# Altium PCB PCB尺子2.PcbDoc (part 2 of 3)
Units mm, origin at the board's own origin, x right, y up, seen from the top; angles counter-clockwise.
Board outline 210 x 35 mm, 2 copper layers (Top Layer, Bottom Layer); 21 components, 0 nets, 1047 pads, 0 vias.
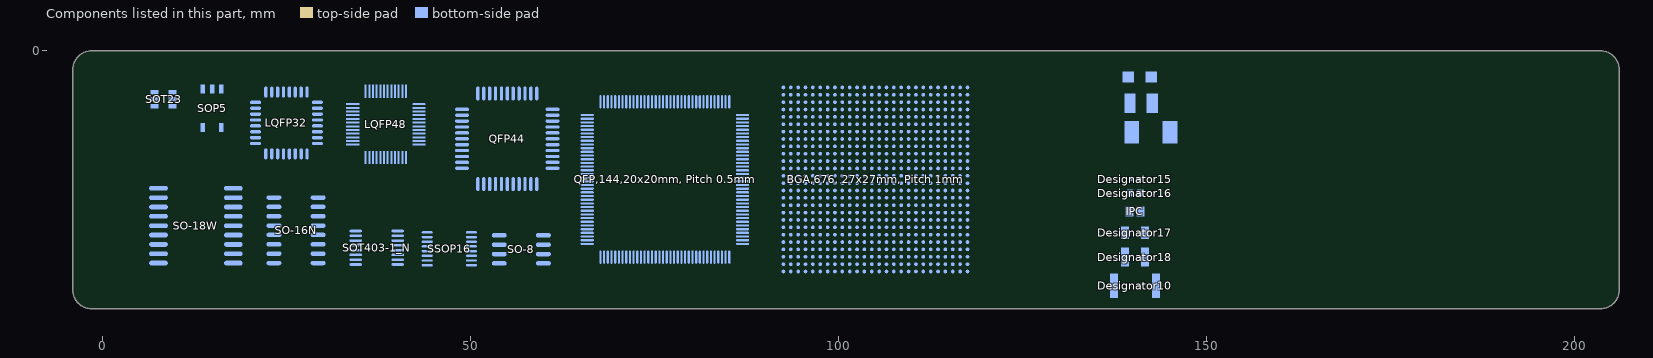
[diagram p2: the components of this part, seen from the top]

## Nets (pads, with @x,y where several pads share a name; then routed paths per layer and width w, separated by ;. In a path a pad name is that pad's centre, name@x,y a point inside that pad or via, vN(x,y) a via of type N, cw(c..) or ccw(c..) an arc to the next point about the centre after c; other vN are vias at no path point)
pads on no net: "BGA,676, 27x27mm, Pitch 1mm.A1" "BGA,676, 27x27mm, Pitch 1mm.A2" "BGA,676, 27x27mm, Pitch 1mm.A3" "BGA,676, 27x27mm, Pitch 1mm.A4" "BGA,676, 27x27mm, Pitch 1mm.A5" "BGA,676, 27x27mm, Pitch 1mm.A6" "BGA,676, 27x27mm, Pitch 1mm.A7" "BGA,676, 27x27mm, Pitch 1mm.A8" "BGA,676, 27x27mm, Pitch 1mm.A9" "BGA,676, 27x27mm, Pitch 1mm.A10" "BGA,676, 27x27mm, Pitch 1mm.A11" "BGA,676, 27x27mm, Pitch 1mm.A12" "BGA,676, 27x27mm, Pitch 1mm.A13" "BGA,676, 27x27mm, Pitch 1mm.A14" "BGA,676, 27x27mm, Pitch 1mm.A15" "BGA,676, 27x27mm, Pitch 1mm.A16" "BGA,676, 27x27mm, Pitch 1mm.A17" "BGA,676, 27x27mm, Pitch 1mm.A18" "BGA,676, 27x27mm, Pitch 1mm.A19" "BGA,676, 27x27mm, Pitch 1mm.A20" "BGA,676, 27x27mm, Pitch 1mm.A21" "BGA,676, 27x27mm, Pitch 1mm.A22" "BGA,676, 27x27mm, Pitch 1mm.A23" "BGA,676, 27x27mm, Pitch 1mm.A24" "BGA,676, 27x27mm, Pitch 1mm.A25" "BGA,676, 27x27mm, Pitch 1mm.A26" "BGA,676, 27x27mm, Pitch 1mm.AA1" "BGA,676, 27x27mm, Pitch 1mm.AA2" "BGA,676, 27x27mm, Pitch 1mm.AA3" "BGA,676, 27x27mm, Pitch 1mm.AA4" "BGA,676, 27x27mm, Pitch 1mm.AA5" "BGA,676, 27x27mm, Pitch 1mm.AA6" "BGA,676, 27x27mm, Pitch 1mm.AA7" "BGA,676, 27x27mm, Pitch 1mm.AA8" "BGA,676, 27x27mm, Pitch 1mm.AA9" "BGA,676, 27x27mm, Pitch 1mm.AA10" "BGA,676, 27x27mm, Pitch 1mm.AA11" "BGA,676, 27x27mm, Pitch 1mm.AA12" "BGA,676, 27x27mm, Pitch 1mm.AA13" "BGA,676, 27x27mm, Pitch 1mm.AA14" "BGA,676, 27x27mm, Pitch 1mm.AA15" "BGA,676, 27x27mm, Pitch 1mm.AA16" "BGA,676, 27x27mm, Pitch 1mm.AA17" "BGA,676, 27x27mm, Pitch 1mm.AA18" "BGA,676, 27x27mm, Pitch 1mm.AA19" "BGA,676, 27x27mm, Pitch 1mm.AA20" "BGA,676, 27x27mm, Pitch 1mm.AA21" "BGA,676, 27x27mm, Pitch 1mm.AA22" "BGA,676, 27x27mm, Pitch 1mm.AA23" "BGA,676, 27x27mm, Pitch 1mm.AA24" "BGA,676, 27x27mm, Pitch 1mm.AA25" "BGA,676, 27x27mm, Pitch 1mm.AA26" "BGA,676, 27x27mm, Pitch 1mm.AB1" "BGA,676, 27x27mm, Pitch 1mm.AB2" "BGA,676, 27x27mm, Pitch 1mm.AB3" "BGA,676, 27x27mm, Pitch 1mm.AB4" "BGA,676, 27x27mm, Pitch 1mm.AB5" "BGA,676, 27x27mm, Pitch 1mm.AB6" "BGA,676, 27x27mm, Pitch 1mm.AB7" "BGA,676, 27x27mm, Pitch 1mm.AB8" "BGA,676, 27x27mm, Pitch 1mm.AB9" "BGA,676, 27x27mm, Pitch 1mm.AB10" "BGA,676, 27x27mm, Pitch 1mm.AB11" "BGA,676, 27x27mm, Pitch 1mm.AB12" "BGA,676, 27x27mm, Pitch 1mm.AB13" "BGA,676, 27x27mm, Pitch 1mm.AB14" "BGA,676, 27x27mm, Pitch 1mm.AB15" "BGA,676, 27x27mm, Pitch 1mm.AB16" "BGA,676, 27x27mm, Pitch 1mm.AB17" "BGA,676, 27x27mm, Pitch 1mm.AB18" "BGA,676, 27x27mm, Pitch 1mm.AB19" "BGA,676, 27x27mm, Pitch 1mm.AB20" "BGA,676, 27x27mm, Pitch 1mm.AB21" "BGA,676, 27x27mm, Pitch 1mm.AB22" "BGA,676, 27x27mm, Pitch 1mm.AB23" "BGA,676, 27x27mm, Pitch 1mm.AB24" "BGA,676, 27x27mm, Pitch 1mm.AB25" "BGA,676, 27x27mm, Pitch 1mm.AB26" "BGA,676, 27x27mm, Pitch 1mm.AC1" "BGA,676, 27x27mm, Pitch 1mm.AC2" "BGA,676, 27x27mm, Pitch 1mm.AC3" "BGA,676, 27x27mm, Pitch 1mm.AC4" "BGA,676, 27x27mm, Pitch 1mm.AC5" "BGA,676, 27x27mm, Pitch 1mm.AC6" "BGA,676, 27x27mm, Pitch 1mm.AC7" "BGA,676, 27x27mm, Pitch 1mm.AC8" "BGA,676, 27x27mm, Pitch 1mm.AC9" "BGA,676, 27x27mm, Pitch 1mm.AC10" "BGA,676, 27x27mm, Pitch 1mm.AC11" "BGA,676, 27x27mm, Pitch 1mm.AC12" "BGA,676, 27x27mm, Pitch 1mm.AC13" "BGA,676, 27x27mm, Pitch 1mm.AC14" "BGA,676, 27x27mm, Pitch 1mm.AC15" "BGA,676, 27x27mm, Pitch 1mm.AC16" "BGA,676, 27x27mm, Pitch 1mm.AC17" "BGA,676, 27x27mm, Pitch 1mm.AC18" "BGA,676, 27x27mm, Pitch 1mm.AC19" "BGA,676, 27x27mm, Pitch 1mm.AC20" "BGA,676, 27x27mm, Pitch 1mm.AC21" "BGA,676, 27x27mm, Pitch 1mm.AC22" "BGA,676, 27x27mm, Pitch 1mm.AC23" "BGA,676, 27x27mm, Pitch 1mm.AC24" "BGA,676, 27x27mm, Pitch 1mm.AC25" "BGA,676, 27x27mm, Pitch 1mm.AC26" "BGA,676, 27x27mm, Pitch 1mm.AD1" "BGA,676, 27x27mm, Pitch 1mm.AD2" "BGA,676, 27x27mm, Pitch 1mm.AD3" "BGA,676, 27x27mm, Pitch 1mm.AD4" "BGA,676, 27x27mm, Pitch 1mm.AD5" "BGA,676, 27x27mm, Pitch 1mm.AD6" "BGA,676, 27x27mm, Pitch 1mm.AD7" "BGA,676, 27x27mm, Pitch 1mm.AD8" "BGA,676, 27x27mm, Pitch 1mm.AD9" "BGA,676, 27x27mm, Pitch 1mm.AD10" "BGA,676, 27x27mm, Pitch 1mm.AD11" "BGA,676, 27x27mm, Pitch 1mm.AD12" "BGA,676, 27x27mm, Pitch 1mm.AD13" "BGA,676, 27x27mm, Pitch 1mm.AD14" "BGA,676, 27x27mm, Pitch 1mm.AD15" "BGA,676, 27x27mm, Pitch 1mm.AD16" "BGA,676, 27x27mm, Pitch 1mm.AD17" "BGA,676, 27x27mm, Pitch 1mm.AD18" "BGA,676, 27x27mm, Pitch 1mm.AD19" "BGA,676, 27x27mm, Pitch 1mm.AD20" "BGA,676, 27x27mm, Pitch 1mm.AD21" "BGA,676, 27x27mm, Pitch 1mm.AD22" "BGA,676, 27x27mm, Pitch 1mm.AD23" "BGA,676, 27x27mm, Pitch 1mm.AD24" "BGA,676, 27x27mm, Pitch 1mm.AD25" "BGA,676, 27x27mm, Pitch 1mm.AD26" "BGA,676, 27x27mm, Pitch 1mm.AE1" "BGA,676, 27x27mm, Pitch 1mm.AE2" "BGA,676, 27x27mm, Pitch 1mm.AE3" "BGA,676, 27x27mm, Pitch 1mm.AE4" "BGA,676, 27x27mm, Pitch 1mm.AE5" "BGA,676, 27x27mm, Pitch 1mm.AE6" "BGA,676, 27x27mm, Pitch 1mm.AE7" "BGA,676, 27x27mm, Pitch 1mm.AE8" "BGA,676, 27x27mm, Pitch 1mm.AE9" "BGA,676, 27x27mm, Pitch 1mm.AE10" "BGA,676, 27x27mm, Pitch 1mm.AE11" "BGA,676, 27x27mm, Pitch 1mm.AE12" "BGA,676, 27x27mm, Pitch 1mm.AE13" "BGA,676, 27x27mm, Pitch 1mm.AE14" "BGA,676, 27x27mm, Pitch 1mm.AE15" "BGA,676, 27x27mm, Pitch 1mm.AE16" "BGA,676, 27x27mm, Pitch 1mm.AE17" "BGA,676, 27x27mm, Pitch 1mm.AE18" "BGA,676, 27x27mm, Pitch 1mm.AE19" "BGA,676, 27x27mm, Pitch 1mm.AE20" "BGA,676, 27x27mm, Pitch 1mm.AE21" "BGA,676, 27x27mm, Pitch 1mm.AE22" "BGA,676, 27x27mm, Pitch 1mm.AE23" "BGA,676, 27x27mm, Pitch 1mm.AE24" "BGA,676, 27x27mm, Pitch 1mm.AE25" "BGA,676, 27x27mm, Pitch 1mm.AE26" "BGA,676, 27x27mm, Pitch 1mm.AF1" "BGA,676, 27x27mm, Pitch 1mm.AF2" "BGA,676, 27x27mm, Pitch 1mm.AF3" "BGA,676, 27x27mm, Pitch 1mm.AF4" "BGA,676, 27x27mm, Pitch 1mm.AF5" "BGA,676, 27x27mm, Pitch 1mm.AF6" "BGA,676, 27x27mm, Pitch 1mm.AF7" "BGA,676, 27x27mm, Pitch 1mm.AF8" "BGA,676, 27x27mm, Pitch 1mm.AF9" "BGA,676, 27x27mm, Pitch 1mm.AF10" "BGA,676, 27x27mm, Pitch 1mm.AF11" "BGA,676, 27x27mm, Pitch 1mm.AF12" "BGA,676, 27x27mm, Pitch 1mm.AF13" "BGA,676, 27x27mm, Pitch 1mm.AF14" "BGA,676, 27x27mm, Pitch 1mm.AF15" "BGA,676, 27x27mm, Pitch 1mm.AF16" "BGA,676, 27x27mm, Pitch 1mm.AF17" "BGA,676, 27x27mm, Pitch 1mm.AF18" "BGA,676, 27x27mm, Pitch 1mm.AF19" "BGA,676, 27x27mm, Pitch 1mm.AF20" "BGA,676, 27x27mm, Pitch 1mm.AF21" "BGA,676, 27x27mm, Pitch 1mm.AF22" "BGA,676, 27x27mm, Pitch 1mm.AF23" "BGA,676, 27x27mm, Pitch 1mm.AF24" "BGA,676, 27x27mm, Pitch 1mm.AF25" "BGA,676, 27x27mm, Pitch 1mm.AF26" "BGA,676, 27x27mm, Pitch 1mm.B1" "BGA,676, 27x27mm, Pitch 1mm.B2" "BGA,676, 27x27mm, Pitch 1mm.B3" "BGA,676, 27x27mm, Pitch 1mm.B4" "BGA,676, 27x27mm, Pitch 1mm.B5" "BGA,676, 27x27mm, Pitch 1mm.B6" "BGA,676, 27x27mm, Pitch 1mm.B7" "BGA,676, 27x27mm, Pitch 1mm.B8" "BGA,676, 27x27mm, Pitch 1mm.B9" "BGA,676, 27x27mm, Pitch 1mm.B10" "BGA,676, 27x27mm, Pitch 1mm.B11" "BGA,676, 27x27mm, Pitch 1mm.B12" "BGA,676, 27x27mm, Pitch 1mm.B13" "BGA,676, 27x27mm, Pitch 1mm.B14" "BGA,676, 27x27mm, Pitch 1mm.B15" "BGA,676, 27x27mm, Pitch 1mm.B16" "BGA,676, 27x27mm, Pitch 1mm.B17" "BGA,676, 27x27mm, Pitch 1mm.B18" "BGA,676, 27x27mm, Pitch 1mm.B19" "BGA,676, 27x27mm, Pitch 1mm.B20" "BGA,676, 27x27mm, Pitch 1mm.B21" "BGA,676, 27x27mm, Pitch 1mm.B22" "BGA,676, 27x27mm, Pitch 1mm.B23" "BGA,676, 27x27mm, Pitch 1mm.B24" "BGA,676, 27x27mm, Pitch 1mm.B25" "BGA,676, 27x27mm, Pitch 1mm.B26" "BGA,676, 27x27mm, Pitch 1mm.C1" "BGA,676, 27x27mm, Pitch 1mm.C2" "BGA,676, 27x27mm, Pitch 1mm.C3" "BGA,676, 27x27mm, Pitch 1mm.C4" "BGA,676, 27x27mm, Pitch 1mm.C5" "BGA,676, 27x27mm, Pitch 1mm.C6" "BGA,676, 27x27mm, Pitch 1mm.C7" "BGA,676, 27x27mm, Pitch 1mm.C8" "BGA,676, 27x27mm, Pitch 1mm.C9" "BGA,676, 27x27mm, Pitch 1mm.C10" "BGA,676, 27x27mm, Pitch 1mm.C11" "BGA,676, 27x27mm, Pitch 1mm.C12" "BGA,676, 27x27mm, Pitch 1mm.C13" "BGA,676, 27x27mm, Pitch 1mm.C14" "BGA,676, 27x27mm, Pitch 1mm.C15" "BGA,676, 27x27mm, Pitch 1mm.C16" "BGA,676, 27x27mm, Pitch 1mm.C17" "BGA,676, 27x27mm, Pitch 1mm.C18" "BGA,676, 27x27mm, Pitch 1mm.C19" "BGA,676, 27x27mm, Pitch 1mm.C20" "BGA,676, 27x27mm, Pitch 1mm.C21" "BGA,676, 27x27mm, Pitch 1mm.C22" "BGA,676, 27x27mm, Pitch 1mm.C23" "BGA,676, 27x27mm, Pitch 1mm.C24" "BGA,676, 27x27mm, Pitch 1mm.C25" "BGA,676, 27x27mm, Pitch 1mm.C26" "BGA,676, 27x27mm, Pitch 1mm.D1" "BGA,676, 27x27mm, Pitch 1mm.D2" "BGA,676, 27x27mm, Pitch 1mm.D3" "BGA,676, 27x27mm, Pitch 1mm.D4" "BGA,676, 27x27mm, Pitch 1mm.D5" "BGA,676, 27x27mm, Pitch 1mm.D6" "BGA,676, 27x27mm, Pitch 1mm.D7" "BGA,676, 27x27mm, Pitch 1mm.D8" "BGA,676, 27x27mm, Pitch 1mm.D9" "BGA,676, 27x27mm, Pitch 1mm.D10" "BGA,676, 27x27mm, Pitch 1mm.D11" "BGA,676, 27x27mm, Pitch 1mm.D12" "BGA,676, 27x27mm, Pitch 1mm.D13" "BGA,676, 27x27mm, Pitch 1mm.D14" "BGA,676, 27x27mm, Pitch 1mm.D15" "BGA,676, 27x27mm, Pitch 1mm.D16" "BGA,676, 27x27mm, Pitch 1mm.D17" "BGA,676, 27x27mm, Pitch 1mm.D18" "BGA,676, 27x27mm, Pitch 1mm.D19" "BGA,676, 27x27mm, Pitch 1mm.D20" "BGA,676, 27x27mm, Pitch 1mm.D21" "BGA,676, 27x27mm, Pitch 1mm.D22" "BGA,676, 27x27mm, Pitch 1mm.D23" "BGA,676, 27x27mm, Pitch 1mm.D24" "BGA,676, 27x27mm, Pitch 1mm.D25" "BGA,676, 27x27mm, Pitch 1mm.D26" "BGA,676, 27x27mm, Pitch 1mm.E1" "BGA,676, 27x27mm, Pitch 1mm.E2" "BGA,676, 27x27mm, Pitch 1mm.E3" "BGA,676, 27x27mm, Pitch 1mm.E4" "BGA,676, 27x27mm, Pitch 1mm.E5" "BGA,676, 27x27mm, Pitch 1mm.E6" "BGA,676, 27x27mm, Pitch 1mm.E7" "BGA,676, 27x27mm, Pitch 1mm.E8" "BGA,676, 27x27mm, Pitch 1mm.E9" "BGA,676, 27x27mm, Pitch 1mm.E10" "BGA,676, 27x27mm, Pitch 1mm.E11" "BGA,676, 27x27mm, Pitch 1mm.E12" "BGA,676, 27x27mm, Pitch 1mm.E13" "BGA,676, 27x27mm, Pitch 1mm.E14" "BGA,676, 27x27mm, Pitch 1mm.E15" "BGA,676, 27x27mm, Pitch 1mm.E16" "BGA,676, 27x27mm, Pitch 1mm.E17" "BGA,676, 27x27mm, Pitch 1mm.E18" "BGA,676, 27x27mm, Pitch 1mm.E19" "BGA,676, 27x27mm, Pitch 1mm.E20" "BGA,676, 27x27mm, Pitch 1mm.E21" "BGA,676, 27x27mm, Pitch 1mm.E22" "BGA,676, 27x27mm, Pitch 1mm.E23" "BGA,676, 27x27mm, Pitch 1mm.E24" "BGA,676, 27x27mm, Pitch 1mm.E25" "BGA,676, 27x27mm, Pitch 1mm.E26" "BGA,676, 27x27mm, Pitch 1mm.F1" "BGA,676, 27x27mm, Pitch 1mm.F2" "BGA,676, 27x27mm, Pitch 1mm.F3" "BGA,676, 27x27mm, Pitch 1mm.F4" "BGA,676, 27x27mm, Pitch 1mm.F5" "BGA,676, 27x27mm, Pitch 1mm.F6" "BGA,676, 27x27mm, Pitch 1mm.F7" "BGA,676, 27x27mm, Pitch 1mm.F8" "BGA,676, 27x27mm, Pitch 1mm.F9" "BGA,676, 27x27mm, Pitch 1mm.F10" "BGA,676, 27x27mm, Pitch 1mm.F11" "BGA,676, 27x27mm, Pitch 1mm.F12" "BGA,676, 27x27mm, Pitch 1mm.F13" "BGA,676, 27x27mm, Pitch 1mm.F14" "BGA,676, 27x27mm, Pitch 1mm.F15" "BGA,676, 27x27mm, Pitch 1mm.F16" "BGA,676, 27x27mm, Pitch 1mm.F17" "BGA,676, 27x27mm, Pitch 1mm.F18" "BGA,676, 27x27mm, Pitch 1mm.F19" "BGA,676, 27x27mm, Pitch 1mm.F20" "BGA,676, 27x27mm, Pitch 1mm.F21" "BGA,676, 27x27mm, Pitch 1mm.F22" "BGA,676, 27x27mm, Pitch 1mm.F23" "BGA,676, 27x27mm, Pitch 1mm.F24" "BGA,676, 27x27mm, Pitch 1mm.F25" "BGA,676, 27x27mm, Pitch 1mm.F26" "BGA,676, 27x27mm, Pitch 1mm.G1" "BGA,676, 27x27mm, Pitch 1mm.G2" "BGA,676, 27x27mm, Pitch 1mm.G3" "BGA,676, 27x27mm, Pitch 1mm.G4" "BGA,676, 27x27mm, Pitch 1mm.G5" "BGA,676, 27x27mm, Pitch 1mm.G6" "BGA,676, 27x27mm, Pitch 1mm.G7" "BGA,676, 27x27mm, Pitch 1mm.G8" "BGA,676, 27x27mm, Pitch 1mm.G9" "BGA,676, 27x27mm, Pitch 1mm.G10" "BGA,676, 27x27mm, Pitch 1mm.G11" "BGA,676, 27x27mm, Pitch 1mm.G12" "BGA,676, 27x27mm, Pitch 1mm.G13" "BGA,676, 27x27mm, Pitch 1mm.G14" "BGA,676, 27x27mm, Pitch 1mm.G15" "BGA,676, 27x27mm, Pitch 1mm.G16" "BGA,676, 27x27mm, Pitch 1mm.G17" "BGA,676, 27x27mm, Pitch 1mm.G18" "BGA,676, 27x27mm, Pitch 1mm.G19" "BGA,676, 27x27mm, Pitch 1mm.G20" "BGA,676, 27x27mm, Pitch 1mm.G21" "BGA,676, 27x27mm, Pitch 1mm.G22" "BGA,676, 27x27mm, Pitch 1mm.G23" "BGA,676, 27x27mm, Pitch 1mm.G24" "BGA,676, 27x27mm, Pitch 1mm.G25" "BGA,676, 27x27mm, Pitch 1mm.G26" "BGA,676, 27x27mm, Pitch 1mm.H1" "BGA,676, 27x27mm, Pitch 1mm.H2" "BGA,676, 27x27mm, Pitch 1mm.H3" "BGA,676, 27x27mm, Pitch 1mm.H4" "BGA,676, 27x27mm, Pitch 1mm.H5" "BGA,676, 27x27mm, Pitch 1mm.H6" "BGA,676, 27x27mm, Pitch 1mm.H7" "BGA,676, 27x27mm, Pitch 1mm.H8" "BGA,676, 27x27mm, Pitch 1mm.H9" "BGA,676, 27x27mm, Pitch 1mm.H10" "BGA,676, 27x27mm, Pitch 1mm.H11" "BGA,676, 27x27mm, Pitch 1mm.H12" "BGA,676, 27x27mm, Pitch 1mm.H13" "BGA,676, 27x27mm, Pitch 1mm.H14" "BGA,676, 27x27mm, Pitch 1mm.H15" "BGA,676, 27x27mm, Pitch 1mm.H16" "BGA,676, 27x27mm, Pitch 1mm.H17" "BGA,676, 27x27mm, Pitch 1mm.H18" "BGA,676, 27x27mm, Pitch 1mm.H19" "BGA,676, 27x27mm, Pitch 1mm.H20" "BGA,676, 27x27mm, Pitch 1mm.H21" "BGA,676, 27x27mm, Pitch 1mm.H22" "BGA,676, 27x27mm, Pitch 1mm.H23" "BGA,676, 27x27mm, Pitch 1mm.H24" "BGA,676, 27x27mm, Pitch 1mm.H25" "BGA,676, 27x27mm, Pitch 1mm.H26" "BGA,676, 27x27mm, Pitch 1mm.J1" "BGA,676, 27x27mm, Pitch 1mm.J2" "BGA,676, 27x27mm, Pitch 1mm.J3" "BGA,676, 27x27mm, Pitch 1mm.J4" "BGA,676, 27x27mm, Pitch 1mm.J5" "BGA,676, 27x27mm, Pitch 1mm.J6" "BGA,676, 27x27mm, Pitch 1mm.J7" "BGA,676, 27x27mm, Pitch 1mm.J8" "BGA,676, 27x27mm, Pitch 1mm.J9" "BGA,676, 27x27mm, Pitch 1mm.J10" "BGA,676, 27x27mm, Pitch 1mm.J11" "BGA,676, 27x27mm, Pitch 1mm.J12" "BGA,676, 27x27mm, Pitch 1mm.J13" "BGA,676, 27x27mm, Pitch 1mm.J14" "BGA,676, 27x27mm, Pitch 1mm.J15" "BGA,676, 27x27mm, Pitch 1mm.J16" "BGA,676, 27x27mm, Pitch 1mm.J17" "BGA,676, 27x27mm, Pitch 1mm.J18" "BGA,676, 27x27mm, Pitch 1mm.J19" "BGA,676, 27x27mm, Pitch 1mm.J20" "BGA,676, 27x27mm, Pitch 1mm.J21" "BGA,676, 27x27mm, Pitch 1mm.J22" "BGA,676, 27x27mm, Pitch 1mm.J23" "BGA,676, 27x27mm, Pitch 1mm.J24" "BGA,676, 27x27mm, Pitch 1mm.J25" "BGA,676, 27x27mm, Pitch 1mm.J26" "BGA,676, 27x27mm, Pitch 1mm.K1" "BGA,676, 27x27mm, Pitch 1mm.K2" "BGA,676, 27x27mm, Pitch 1mm.K3" "BGA,676, 27x27mm, Pitch 1mm.K4" "BGA,676, 27x27mm, Pitch 1mm.K5" "BGA,676, 27x27mm, Pitch 1mm.K6" "BGA,676, 27x27mm, Pitch 1mm.K7" "BGA,676, 27x27mm, Pitch 1mm.K8" "BGA,676, 27x27mm, Pitch 1mm.K9" "BGA,676, 27x27mm, Pitch 1mm.K10" "BGA,676, 27x27mm, Pitch 1mm.K11" "BGA,676, 27x27mm, Pitch 1mm.K12" "BGA,676, 27x27mm, Pitch 1mm.K13" "BGA,676, 27x27mm, Pitch 1mm.K14" "BGA,676, 27x27mm, Pitch 1mm.K15" "BGA,676, 27x27mm, Pitch 1mm.K16" "BGA,676, 27x27mm, Pitch 1mm.K17" "BGA,676, 27x27mm, Pitch 1mm.K18" "BGA,676, 27x27mm, Pitch 1mm.K19" "BGA,676, 27x27mm, Pitch 1mm.K20" "BGA,676, 27x27mm, Pitch 1mm.K21" "BGA,676, 27x27mm, Pitch 1mm.K22" "BGA,676, 27x27mm, Pitch 1mm.K23" "BGA,676, 27x27mm, Pitch 1mm.K24" "BGA,676, 27x27mm, Pitch 1mm.K25" "BGA,676, 27x27mm, Pitch 1mm.K26" "BGA,676, 27x27mm, Pitch 1mm.L1" "BGA,676, 27x27mm, Pitch 1mm.L2" "BGA,676, 27x27mm, Pitch 1mm.L3" "BGA,676, 27x27mm, Pitch 1mm.L4" "BGA,676, 27x27mm, Pitch 1mm.L5" "BGA,676, 27x27mm, Pitch 1mm.L6" "BGA,676, 27x27mm, Pitch 1mm.L7" "BGA,676, 27x27mm, Pitch 1mm.L8" "BGA,676, 27x27mm, Pitch 1mm.L9" "BGA,676, 27x27mm, Pitch 1mm.L10" "BGA,676, 27x27mm, Pitch 1mm.L11" "BGA,676, 27x27mm, Pitch 1mm.L12" "BGA,676, 27x27mm, Pitch 1mm.L13" "BGA,676, 27x27mm, Pitch 1mm.L14" "BGA,676, 27x27mm, Pitch 1mm.L15" "BGA,676, 27x27mm, Pitch 1mm.L16" "BGA,676, 27x27mm, Pitch 1mm.L17" "BGA,676, 27x27mm, Pitch 1mm.L18" "BGA,676, 27x27mm, Pitch 1mm.L19" "BGA,676, 27x27mm, Pitch 1mm.L20" "BGA,676, 27x27mm, Pitch 1mm.L21" "BGA,676, 27x27mm, Pitch 1mm.L22" "BGA,676, 27x27mm, Pitch 1mm.L23" "BGA,676, 27x27mm, Pitch 1mm.L24" "BGA,676, 27x27mm, Pitch 1mm.L25" "BGA,676, 27x27mm, Pitch 1mm.L26" "BGA,676, 27x27mm, Pitch 1mm.M1" "BGA,676, 27x27mm, Pitch 1mm.M2" "BGA,676, 27x27mm, Pitch 1mm.M3" "BGA,676, 27x27mm, Pitch 1mm.M4" "BGA,676, 27x27mm, Pitch 1mm.M5" "BGA,676, 27x27mm, Pitch 1mm.M6" "BGA,676, 27x27mm, Pitch 1mm.M7" "BGA,676, 27x27mm, Pitch 1mm.M8" "BGA,676, 27x27mm, Pitch 1mm.M9" "BGA,676, 27x27mm, Pitch 1mm.M10" "BGA,676, 27x27mm, Pitch 1mm.M11" "BGA,676, 27x27mm, Pitch 1mm.M12" "BGA,676, 27x27mm, Pitch 1mm.M13" "BGA,676, 27x27mm, Pitch 1mm.M14" "BGA,676, 27x27mm, Pitch 1mm.M15" "BGA,676, 27x27mm, Pitch 1mm.M16" "BGA,676, 27x27mm, Pitch 1mm.M17" "BGA,676, 27x27mm, Pitch 1mm.M18" "BGA,676, 27x27mm, Pitch 1mm.M19" "BGA,676, 27x27mm, Pitch 1mm.M20" "BGA,676, 27x27mm, Pitch 1mm.M21" "BGA,676, 27x27mm, Pitch 1mm.M22" "BGA,676, 27x27mm, Pitch 1mm.M23" "BGA,676, 27x27mm, Pitch 1mm.M24" "BGA,676, 27x27mm, Pitch 1mm.M25" "BGA,676, 27x27mm, Pitch 1mm.M26" "BGA,676, 27x27mm, Pitch 1mm.N1" "BGA,676, 27x27mm, Pitch 1mm.N2" "BGA,676, 27x27mm, Pitch 1mm.N3" "BGA,676, 27x27mm, Pitch 1mm.N4" "BGA,676, 27x27mm, Pitch 1mm.N5" "BGA,676, 27x27mm, Pitch 1mm.N6" "BGA,676, 27x27mm, Pitch 1mm.N7" "BGA,676, 27x27mm, Pitch 1mm.N8" "BGA,676, 27x27mm, Pitch 1mm.N9" "BGA,676, 27x27mm, Pitch 1mm.N10" "BGA,676, 27x27mm, Pitch 1mm.N11" "BGA,676, 27x27mm, Pitch 1mm.N12" "BGA,676, 27x27mm, Pitch 1mm.N13" "BGA,676, 27x27mm, Pitch 1mm.N14" "BGA,676, 27x27mm, Pitch 1mm.N15" "BGA,676, 27x27mm, Pitch 1mm.N16" "BGA,676, 27x27mm, Pitch 1mm.N17" "BGA,676, 27x27mm, Pitch 1mm.N18" "BGA,676, 27x27mm, Pitch 1mm.N19" "BGA,676, 27x27mm, Pitch 1mm.N20" "BGA,676, 27x27mm, Pitch 1mm.N21" "BGA,676, 27x27mm, Pitch 1mm.N22" "BGA,676, 27x27mm, Pitch 1mm.N23" "BGA,676, 27x27mm, Pitch 1mm.N24" "BGA,676, 27x27mm, Pitch 1mm.N25" "BGA,676, 27x27mm, Pitch 1mm.N26" "BGA,676, 27x27mm, Pitch 1mm.P1" "BGA,676, 27x27mm, Pitch 1mm.P2" "BGA,676, 27x27mm, Pitch 1mm.P3" "BGA,676, 27x27mm, Pitch 1mm.P4" "BGA,676, 27x27mm, Pitch 1mm.P5" "BGA,676, 27x27mm, Pitch 1mm.P6" "BGA,676, 27x27mm, Pitch 1mm.P7" "BGA,676, 27x27mm, Pitch 1mm.P8" "BGA,676, 27x27mm, Pitch 1mm.P9" "BGA,676, 27x27mm, Pitch 1mm.P10" "BGA,676, 27x27mm, Pitch 1mm.P11" "BGA,676, 27x27mm, Pitch 1mm.P12" "BGA,676, 27x27mm, Pitch 1mm.P13" "BGA,676, 27x27mm, Pitch 1mm.P14" "BGA,676, 27x27mm, Pitch 1mm.P15" "BGA,676, 27x27mm, Pitch 1mm.P16" "BGA,676, 27x27mm, Pitch 1mm.P17" "BGA,676, 27x27mm, Pitch 1mm.P18" "BGA,676, 27x27mm, Pitch 1mm.P19" "BGA,676, 27x27mm, Pitch 1mm.P20" "BGA,676, 27x27mm, Pitch 1mm.P21" "BGA,676, 27x27mm, Pitch 1mm.P22" "BGA,676, 27x27mm, Pitch 1mm.P23" "BGA,676, 27x27mm, Pitch 1mm.P24" "BGA,676, 27x27mm, Pitch 1mm.P25" "BGA,676, 27x27mm, Pitch 1mm.P26" "BGA,676, 27x27mm, Pitch 1mm.R1" "BGA,676, 27x27mm, Pitch 1mm.R2" "BGA,676, 27x27mm, Pitch 1mm.R3" "BGA,676, 27x27mm, Pitch 1mm.R4" "BGA,676, 27x27mm, Pitch 1mm.R5" "BGA,676, 27x27mm, Pitch 1mm.R6" "BGA,676, 27x27mm, Pitch 1mm.R7" "BGA,676, 27x27mm, Pitch 1mm.R8" "BGA,676, 27x27mm, Pitch 1mm.R9" "BGA,676, 27x27mm, Pitch 1mm.R10" "BGA,676, 27x27mm, Pitch 1mm.R11" "BGA,676, 27x27mm, Pitch 1mm.R12" "BGA,676, 27x27mm, Pitch 1mm.R13" "BGA,676, 27x27mm, Pitch 1mm.R14" "BGA,676, 27x27mm, Pitch 1mm.R15" "BGA,676, 27x27mm, Pitch 1mm.R16" "BGA,676, 27x27mm, Pitch 1mm.R17" "BGA,676, 27x27mm, Pitch 1mm.R18" "BGA,676, 27x27mm, Pitch 1mm.R19" "BGA,676, 27x27mm, Pitch 1mm.R20" "BGA,676, 27x27mm, Pitch 1mm.R21" "BGA,676, 27x27mm, Pitch 1mm.R22" "BGA,676, 27x27mm, Pitch 1mm.R23" "BGA,676, 27x27mm, Pitch 1mm.R24" "BGA,676, 27x27mm, Pitch 1mm.R25" "BGA,676, 27x27mm, Pitch 1mm.R26" "BGA,676, 27x27mm, Pitch 1mm.T1" "BGA,676, 27x27mm, Pitch 1mm.T2" "BGA,676, 27x27mm, Pitch 1mm.T3" "BGA,676, 27x27mm, Pitch 1mm.T4" "BGA,676, 27x27mm, Pitch 1mm.T5" "BGA,676, 27x27mm, Pitch 1mm.T6" "BGA,676, 27x27mm, Pitch 1mm.T7" "BGA,676, 27x27mm, Pitch 1mm.T8" "BGA,676, 27x27mm, Pitch 1mm.T9" "BGA,676, 27x27mm, Pitch 1mm.T10" "BGA,676, 27x27mm, Pitch 1mm.T11" "BGA,676, 27x27mm, Pitch 1mm.T12" "BGA,676, 27x27mm, Pitch 1mm.T13" "BGA,676, 27x27mm, Pitch 1mm.T14" "BGA,676, 27x27mm, Pitch 1mm.T15" "BGA,676, 27x27mm, Pitch 1mm.T16" "BGA,676, 27x27mm, Pitch 1mm.T17" "BGA,676, 27x27mm, Pitch 1mm.T18" "BGA,676, 27x27mm, Pitch 1mm.T19" "BGA,676, 27x27mm, Pitch 1mm.T20" "BGA,676, 27x27mm, Pitch 1mm.T21" "BGA,676, 27x27mm, Pitch 1mm.T22" "BGA,676, 27x27mm, Pitch 1mm.T23" "BGA,676, 27x27mm, Pitch 1mm.T24" "BGA,676, 27x27mm, Pitch 1mm.T25" "BGA,676, 27x27mm, Pitch 1mm.T26" "BGA,676, 27x27mm, Pitch 1mm.U1" "BGA,676, 27x27mm, Pitch 1mm.U2" "BGA,676, 27x27mm, Pitch 1mm.U3" "BGA,676, 27x27mm, Pitch 1mm.U4" "BGA,676, 27x27mm, Pitch 1mm.U5" "BGA,676, 27x27mm, Pitch 1mm.U6" "BGA,676, 27x27mm, Pitch 1mm.U7" "BGA,676, 27x27mm, Pitch 1mm.U8" "BGA,676, 27x27mm, Pitch 1mm.U9" "BGA,676, 27x27mm, Pitch 1mm.U10" "BGA,676, 27x27mm, Pitch 1mm.U11" "BGA,676, 27x27mm, Pitch 1mm.U12" "BGA,676, 27x27mm, Pitch 1mm.U13" "BGA,676, 27x27mm, Pitch 1mm.U14" "BGA,676, 27x27mm, Pitch 1mm.U15" "BGA,676, 27x27mm, Pitch 1mm.U16" "BGA,676, 27x27mm, Pitch 1mm.U17" "BGA,676, 27x27mm, Pitch 1mm.U18" "BGA,676, 27x27mm, Pitch 1mm.U19" "BGA,676, 27x27mm, Pitch 1mm.U20" "BGA,676, 27x27mm, Pitch 1mm.U21" "BGA,676, 27x27mm, Pitch 1mm.U22" "BGA,676, 27x27mm, Pitch 1mm.U23" "BGA,676, 27x27mm, Pitch 1mm.U24" "BGA,676, 27x27mm, Pitch 1mm.U25" "BGA,676, 27x27mm, Pitch 1mm.U26" "BGA,676, 27x27mm, Pitch 1mm.V1" "BGA,676, 27x27mm, Pitch 1mm.V2" "BGA,676, 27x27mm, Pitch 1mm.V3" "BGA,676, 27x27mm, Pitch 1mm.V4" "BGA,676, 27x27mm, Pitch 1mm.V5" "BGA,676, 27x27mm, Pitch 1mm.V6" "BGA,676, 27x27mm, Pitch 1mm.V7" "BGA,676, 27x27mm, Pitch 1mm.V8" "BGA,676, 27x27mm, Pitch 1mm.V9" "BGA,676, 27x27mm, Pitch 1mm.V10" "BGA,676, 27x27mm, Pitch 1mm.V11" "BGA,676, 27x27mm, Pitch 1mm.V12" "BGA,676, 27x27mm, Pitch 1mm.V13" "BGA,676, 27x27mm, Pitch 1mm.V14" "BGA,676, 27x27mm, Pitch 1mm.V15" "BGA,676, 27x27mm, Pitch 1mm.V16" "BGA,676, 27x27mm, Pitch 1mm.V17" "BGA,676, 27x27mm, Pitch 1mm.V18" "BGA,676, 27x27mm, Pitch 1mm.V19" "BGA,676, 27x27mm, Pitch 1mm.V20" "BGA,676, 27x27mm, Pitch 1mm.V21" "BGA,676, 27x27mm, Pitch 1mm.V22" "BGA,676, 27x27mm, Pitch 1mm.V23" "BGA,676, 27x27mm, Pitch 1mm.V24" "BGA,676, 27x27mm, Pitch 1mm.V25" "BGA,676, 27x27mm, Pitch 1mm.V26" "BGA,676, 27x27mm, Pitch 1mm.W1" "BGA,676, 27x27mm, Pitch 1mm.W2" "BGA,676, 27x27mm, Pitch 1mm.W3" "BGA,676, 27x27mm, Pitch 1mm.W4" "BGA,676, 27x27mm, Pitch 1mm.W5" "BGA,676, 27x27mm, Pitch 1mm.W6" "BGA,676, 27x27mm, Pitch 1mm.W7" "BGA,676, 27x27mm, Pitch 1mm.W8" "BGA,676, 27x27mm, Pitch 1mm.W9" "BGA,676, 27x27mm, Pitch 1mm.W10" "BGA,676, 27x27mm, Pitch 1mm.W11" "BGA,676, 27x27mm, Pitch 1mm.W12" "BGA,676, 27x27mm, Pitch 1mm.W13" "BGA,676, 27x27mm, Pitch 1mm.W14" "BGA,676, 27x27mm, Pitch 1mm.W15" "BGA,676, 27x27mm, Pitch 1mm.W16" "BGA,676, 27x27mm, Pitch 1mm.W17" "BGA,676, 27x27mm, Pitch 1mm.W18" "BGA,676, 27x27mm, Pitch 1mm.W19" "BGA,676, 27x27mm, Pitch 1mm.W20" "BGA,676, 27x27mm, Pitch 1mm.W21" "BGA,676, 27x27mm, Pitch 1mm.W22" "BGA,676, 27x27mm, Pitch 1mm.W23" "BGA,676, 27x27mm, Pitch 1mm.W24" "BGA,676, 27x27mm, Pitch 1mm.W25" "BGA,676, 27x27mm, Pitch 1mm.W26" "BGA,676, 27x27mm, Pitch 1mm.Y1" "BGA,676, 27x27mm, Pitch 1mm.Y2" "BGA,676, 27x27mm, Pitch 1mm.Y3" "BGA,676, 27x27mm, Pitch 1mm.Y4" "BGA,676, 27x27mm, Pitch 1mm.Y5" "BGA,676, 27x27mm, Pitch 1mm.Y6" "BGA,676, 27x27mm, Pitch 1mm.Y7" "BGA,676, 27x27mm, Pitch 1mm.Y8" "BGA,676, 27x27mm, Pitch 1mm.Y9" "BGA,676, 27x27mm, Pitch 1mm.Y10" "BGA,676, 27x27mm, Pitch 1mm.Y11" "BGA,676, 27x27mm, Pitch 1mm.Y12" "BGA,676, 27x27mm, Pitch 1mm.Y13" "BGA,676, 27x27mm, Pitch 1mm.Y14" "BGA,676, 27x27mm, Pitch 1mm.Y15" "BGA,676, 27x27mm, Pitch 1mm.Y16" "BGA,676, 27x27mm, Pitch 1mm.Y17" "BGA,676, 27x27mm, Pitch 1mm.Y18" "BGA,676, 27x27mm, Pitch 1mm.Y19" "BGA,676, 27x27mm, Pitch 1mm.Y20" "BGA,676, 27x27mm, Pitch 1mm.Y21" "BGA,676, 27x27mm, Pitch 1mm.Y22" "BGA,676, 27x27mm, Pitch 1mm.Y23" "BGA,676, 27x27mm, Pitch 1mm.Y24" "BGA,676, 27x27mm, Pitch 1mm.Y25" "BGA,676, 27x27mm, Pitch 1mm.Y26" "QFP,144,20x20mm, Pitch 0.5mm.1" "QFP,144,20x20mm, Pitch 0.5mm.2" "QFP,144,20x20mm, Pitch 0.5mm.3" "QFP,144,20x20mm, Pitch 0.5mm.4" "QFP,144,20x20mm, Pitch 0.5mm.5" "QFP,144,20x20mm, Pitch 0.5mm.6" "QFP,144,20x20mm, Pitch 0.5mm.7" "QFP,144,20x20mm, Pitch 0.5mm.8" "QFP,144,20x20mm, Pitch 0.5mm.9" "QFP,144,20x20mm, Pitch 0.5mm.10" "QFP,144,20x20mm, Pitch 0.5mm.11" "QFP,144,20x20mm, Pitch 0.5mm.12" "QFP,144,20x20mm, Pitch 0.5mm.13" "QFP,144,20x20mm, Pitch 0.5mm.14" "QFP,144,20x20mm, Pitch 0.5mm.15" "QFP,144,20x20mm, Pitch 0.5mm.16" "QFP,144,20x20mm, Pitch 0.5mm.17" "QFP,144,20x20mm, Pitch 0.5mm.18" "QFP,144,20x20mm, Pitch 0.5mm.19" "QFP,144,20x20mm, Pitch 0.5mm.20" "QFP,144,20x20mm, Pitch 0.5mm.21" "QFP,144,20x20mm, Pitch 0.5mm.22" "QFP,144,20x20mm, Pitch 0.5mm.23" "QFP,144,20x20mm, Pitch 0.5mm.24" "QFP,144,20x20mm, Pitch 0.5mm.25" "QFP,144,20x20mm, Pitch 0.5mm.26" "QFP,144,20x20mm, Pitch 0.5mm.27" "QFP,144,20x20mm, Pitch 0.5mm.28" "QFP,144,20x20mm, Pitch 0.5mm.29" "QFP,144,20x20mm, Pitch 0.5mm.30" "QFP,144,20x20mm, Pitch 0.5mm.31" "QFP,144,20x20mm, Pitch 0.5mm.32" "QFP,144,20x20mm, Pitch 0.5mm.33" "QFP,144,20x20mm, Pitch 0.5mm.34" "QFP,144,20x20mm, Pitch 0.5mm.35" "QFP,144,20x20mm, Pitch 0.5mm.36" "QFP,144,20x20mm, Pitch 0.5mm.37" "QFP,144,20x20mm, Pitch 0.5mm.38" "QFP,144,20x20mm, Pitch 0.5mm.39" "QFP,144,20x20mm, Pitch 0.5mm.40" "QFP,144,20x20mm, Pitch 0.5mm.41" "QFP,144,20x20mm, Pitch 0.5mm.42" "QFP,144,20x20mm, Pitch 0.5mm.43" "QFP,144,20x20mm, Pitch 0.5mm.44" "QFP,144,20x20mm, Pitch 0.5mm.45" "QFP,144,20x20mm, Pitch 0.5mm.46" "QFP,144,20x20mm, Pitch 0.5mm.47" "QFP,144,20x20mm, Pitch 0.5mm.48" "QFP,144,20x20mm, Pitch 0.5mm.49" "QFP,144,20x20mm, Pitch 0.5mm.50" "QFP,144,20x20mm, Pitch 0.5mm.51" "QFP,144,20x20mm, Pitch 0.5mm.52" "QFP,144,20x20mm, Pitch 0.5mm.53" "QFP,144,20x20mm, Pitch 0.5mm.54" "QFP,144,20x20mm, Pitch 0.5mm.55" "QFP,144,20x20mm, Pitch 0.5mm.56" "QFP,144,20x20mm, Pitch 0.5mm.57" "QFP,144,20x20mm, Pitch 0.5mm.58" "QFP,144,20x20mm, Pitch 0.5mm.59" "QFP,144,20x20mm, Pitch 0.5mm.60" "QFP,144,20x20mm, Pitch 0.5mm.61" "QFP,144,20x20mm, Pitch 0.5mm.62" "QFP,144,20x20mm, Pitch 0.5mm.63" "QFP,144,20x20mm, Pitch 0.5mm.64" "QFP,144,20x20mm, Pitch 0.5mm.65" "QFP,144,20x20mm, Pitch 0.5mm.66" "QFP,144,20x20mm, Pitch 0.5mm.67" "QFP,144,20x20mm, Pitch 0.5mm.68" "QFP,144,20x20mm, Pitch 0.5mm.69" "QFP,144,20x20mm, Pitch 0.5mm.70" "QFP,144,20x20mm, Pitch 0.5mm.71" "QFP,144,20x20mm, Pitch 0.5mm.72" "QFP,144,20x20mm, Pitch 0.5mm.73" "QFP,144,20x20mm, Pitch 0.5mm.74" "QFP,144,20x20mm, Pitch 0.5mm.75" "QFP,144,20x20mm, Pitch 0.5mm.76" "QFP,144,20x20mm, Pitch 0.5mm.77" "QFP,144,20x20mm, Pitch 0.5mm.78" "QFP,144,20x20mm, Pitch 0.5mm.79" "QFP,144,20x20mm, Pitch 0.5mm.80" "QFP,144,20x20mm, Pitch 0.5mm.81" "QFP,144,20x20mm, Pitch 0.5mm.82" "QFP,144,20x20mm, Pitch 0.5mm.83" "QFP,144,20x20mm, Pitch 0.5mm.84" "QFP,144,20x20mm, Pitch 0.5mm.85" "QFP,144,20x20mm, Pitch 0.5mm.86" "QFP,144,20x20mm, Pitch 0.5mm.87" "QFP,144,20x20mm, Pitch 0.5mm.88" "QFP,144,20x20mm, Pitch 0.5mm.89" "QFP,144,20x20mm, Pitch 0.5mm.90" "QFP,144,20x20mm, Pitch 0.5mm.91" "QFP,144,20x20mm, Pitch 0.5mm.92" "QFP,144,20x20mm, Pitch 0.5mm.93" "QFP,144,20x20mm, Pitch 0.5mm.94" "QFP,144,20x20mm, Pitch 0.5mm.95" "QFP,144,20x20mm, Pitch 0.5mm.96" "QFP,144,20x20mm, Pitch 0.5mm.97" "QFP,144,20x20mm, Pitch 0.5mm.98" "QFP,144,20x20mm, Pitch 0.5mm.99" "QFP,144,20x20mm, Pitch 0.5mm.100" "QFP,144,20x20mm, Pitch 0.5mm.101" "QFP,144,20x20mm, Pitch 0.5mm.102" "QFP,144,20x20mm, Pitch 0.5mm.103" "QFP,144,20x20mm, Pitch 0.5mm.104" "QFP,144,20x20mm, Pitch 0.5mm.105" "QFP,144,20x20mm, Pitch 0.5mm.106" "QFP,144,20x20mm, Pitch 0.5mm.107" "QFP,144,20x20mm, Pitch 0.5mm.108" "QFP,144,20x20mm, Pitch 0.5mm.109" "QFP,144,20x20mm, Pitch 0.5mm.110" "QFP,144,20x20mm, Pitch 0.5mm.111" "QFP,144,20x20mm, Pitch 0.5mm.112" "QFP,144,20x20mm, Pitch 0.5mm.113" "QFP,144,20x20mm, Pitch 0.5mm.114" "QFP,144,20x20mm, Pitch 0.5mm.115" "QFP,144,20x20mm, Pitch 0.5mm.116" "QFP,144,20x20mm, Pitch 0.5mm.117" "QFP,144,20x20mm, Pitch 0.5mm.118" "QFP,144,20x20mm, Pitch 0.5mm.119" "QFP,144,20x20mm, Pitch 0.5mm.120" "QFP,144,20x20mm, Pitch 0.5mm.121" "QFP,144,20x20mm, Pitch 0.5mm.122" "QFP,144,20x20mm, Pitch 0.5mm.123" "QFP,144,20x20mm, Pitch 0.5mm.124" "QFP,144,20x20mm, Pitch 0.5mm.125" "QFP,144,20x20mm, Pitch 0.5mm.126" "QFP,144,20x20mm, Pitch 0.5mm.127" "QFP,144,20x20mm, Pitch 0.5mm.128" "QFP,144,20x20mm, Pitch 0.5mm.129" "QFP,144,20x20mm, Pitch 0.5mm.130" "QFP,144,20x20mm, Pitch 0.5mm.131" "QFP,144,20x20mm, Pitch 0.5mm.132" "QFP,144,20x20mm, Pitch 0.5mm.133" "QFP,144,20x20mm, Pitch 0.5mm.134" "QFP,144,20x20mm, Pitch 0.5mm.135" "QFP,144,20x20mm, Pitch 0.5mm.136" "QFP,144,20x20mm, Pitch 0.5mm.137" "QFP,144,20x20mm, Pitch 0.5mm.138" "QFP,144,20x20mm, Pitch 0.5mm.139" "QFP,144,20x20mm, Pitch 0.5mm.140" "QFP,144,20x20mm, Pitch 0.5mm.141" "QFP,144,20x20mm, Pitch 0.5mm.142" "QFP,144,20x20mm, Pitch 0.5mm.143" "QFP,144,20x20mm, Pitch 0.5mm.144" ?.A ?.K Designator10.1 Designator10.2 Designator15.1 Designator15.2 Designator16.1 Designator16.2 Designator17.1 Designator17.2 Designator18.1 Designator18.2 IPC.1 IPC.2 LQFP32.1 LQFP32.2 LQFP32.3 LQFP32.4 LQFP32.5 LQFP32.6 LQFP32.7 LQFP32.8 LQFP32.9 LQFP32.10 LQFP32.11 LQFP32.12 LQFP32.13 LQFP32.14 LQFP32.15 LQFP32.16 LQFP32.17 LQFP32.18 LQFP32.19 LQFP32.20 LQFP32.21 LQFP32.22 LQFP32.23 LQFP32.24 LQFP32.25 LQFP32.26 LQFP32.27 LQFP32.28 LQFP32.29 LQFP32.30 LQFP32.31 LQFP32.32 LQFP48.1 LQFP48.2 LQFP48.3 LQFP48.4 LQFP48.5 LQFP48.6 LQFP48.7 LQFP48.8 LQFP48.9 LQFP48.10 LQFP48.11 LQFP48.12 LQFP48.13 LQFP48.14 LQFP48.15 LQFP48.16 LQFP48.17 LQFP48.18 LQFP48.19 LQFP48.20 LQFP48.21 LQFP48.22 LQFP48.23 LQFP48.24 LQFP48.25 LQFP48.26 LQFP48.27 LQFP48.28 LQFP48.29 LQFP48.30 LQFP48.31 LQFP48.32 LQFP48.33 LQFP48.34 LQFP48.35 LQFP48.36 LQFP48.37 LQFP48.38 LQFP48.39 LQFP48.40 LQFP48.41 LQFP48.42 LQFP48.43 LQFP48.44 LQFP48.45 LQFP48.46 LQFP48.47 LQFP48.48 QFP44.1 QFP44.2 QFP44.3 QFP44.4 QFP44.5 QFP44.6 QFP44.7 QFP44.8 QFP44.9 QFP44.10 QFP44.11 QFP44.12 QFP44.13 QFP44.14 QFP44.15 QFP44.16 QFP44.17 QFP44.18 QFP44.19 QFP44.20 QFP44.21 QFP44.22 QFP44.23 QFP44.24 QFP44.25 QFP44.26 QFP44.27 QFP44.28 QFP44.29 QFP44.30 QFP44.31 QFP44.32 QFP44.33 QFP44.34 QFP44.35 QFP44.36 QFP44.37 QFP44.38 QFP44.39 QFP44.40 QFP44.41 QFP44.42 QFP44.43 QFP44.44 SO-8.1 SO-8.2 SO-8.3 SO-8.4 SO-8.5 SO-8.6 SO-8.7 SO-8.8 SO-16N.1 SO-16N.2 SO-16N.3 SO-16N.4 SO-16N.5 SO-16N.6 SO-16N.7 SO-16N.8 SO-16N.9 SO-16N.10 SO-16N.11 SO-16N.12 SO-16N.13 SO-16N.14 SO-16N.15 SO-16N.16 SO-18W.1 SO-18W.2 SO-18W.3 SO-18W.4 SO-18W.5 SO-18W.6 SO-18W.7 SO-18W.8 SO-18W.9 SO-18W.10 SO-18W.11 SO-18W.12 SO-18W.13 SO-18W.14 SO-18W.15 SO-18W.16 SO-18W.17 SO-18W.18 SOP5.1 SOP5.3 SOP5.4 SOP5.5 SOP5.6 SOT23.1 SOT23.2 SOT23.3 SOT23.4 SOT23.5 SOT23.6 SOT403-1_N.1 SOT403-1_N.2 SOT403-1_N.3 SOT403-1_N.4 SOT403-1_N.5 SOT403-1_N.6 SOT403-1_N.7 SOT403-1_N.8 SOT403-1_N.9 SOT403-1_N.10 SOT403-1_N.11 SOT403-1_N.12 SOT403-1_N.13 SOT403-1_N.14 SOT403-1_N.15 SOT403-1_N.16 SSOP16.1 SSOP16.2 SSOP16.3 SSOP16.4 SSOP16.5 SSOP16.6 SSOP16.7 SSOP16.8 SSOP16.9 SSOP16.10 SSOP16.11 SSOP16.12 SSOP16.13 SSOP16.14 SSOP16.15 SSOP16.16